# Altium PCB Example.PcbDoc (part 1 of 2)
Units mm, origin at the board's own origin, x right, y up, seen from the top; angles counter-clockwise.
Board outline 168.2 x 69.2 mm, 2 copper layers (Top Layer, Top, Bottom Layer, Bottom), stack 1.71 mm thick; 73 components, 24 nets, 188 pads, 846 vias.
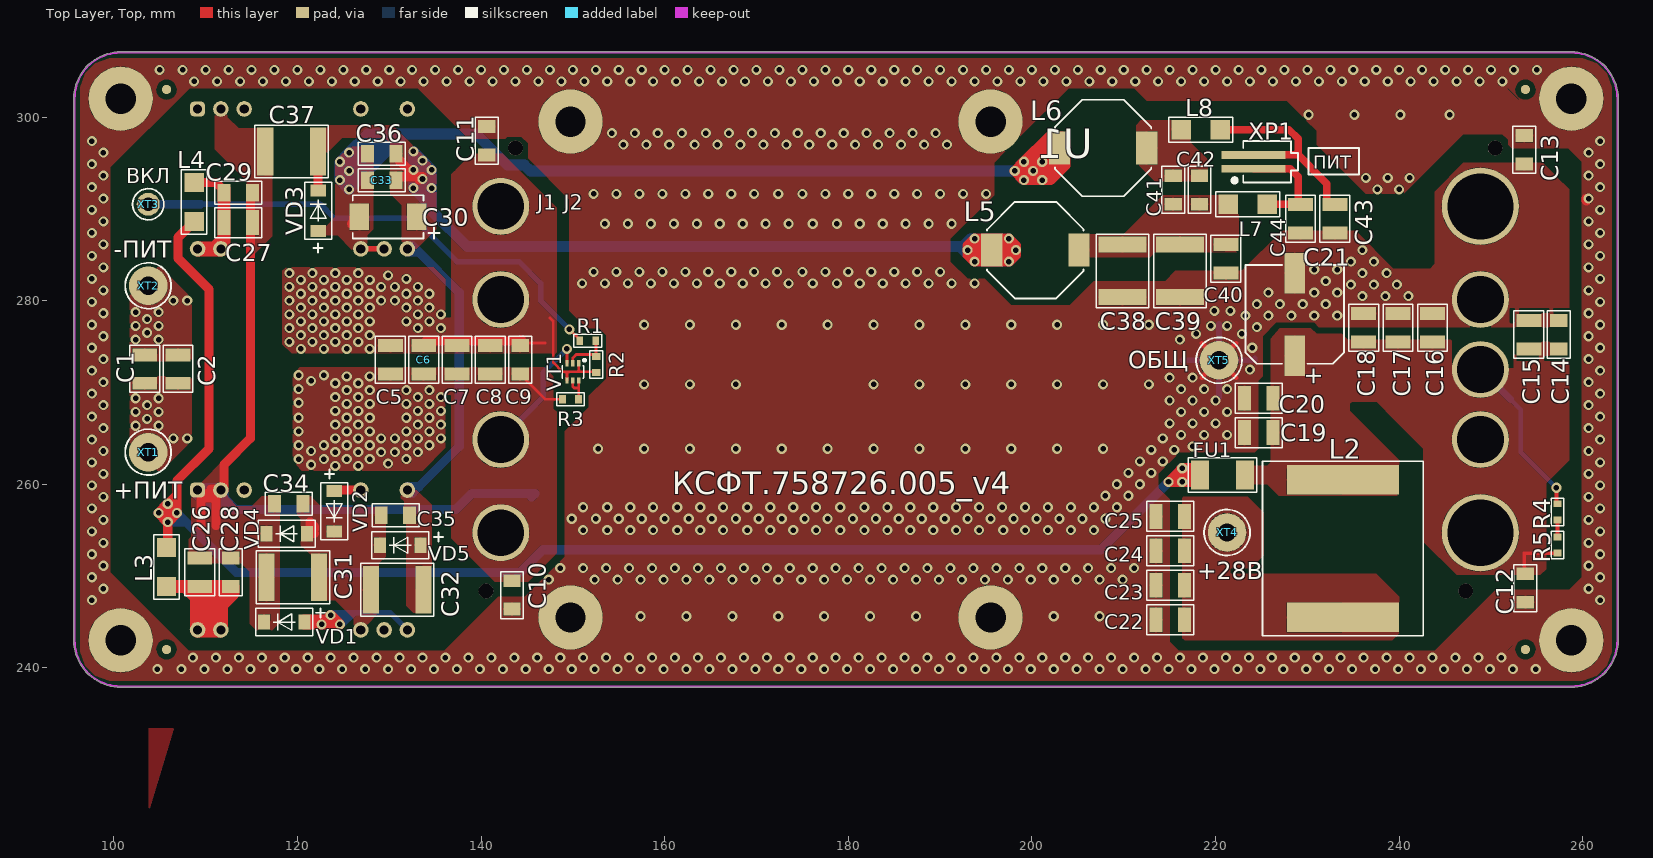
[diagram p0: Top Layer, Top view]
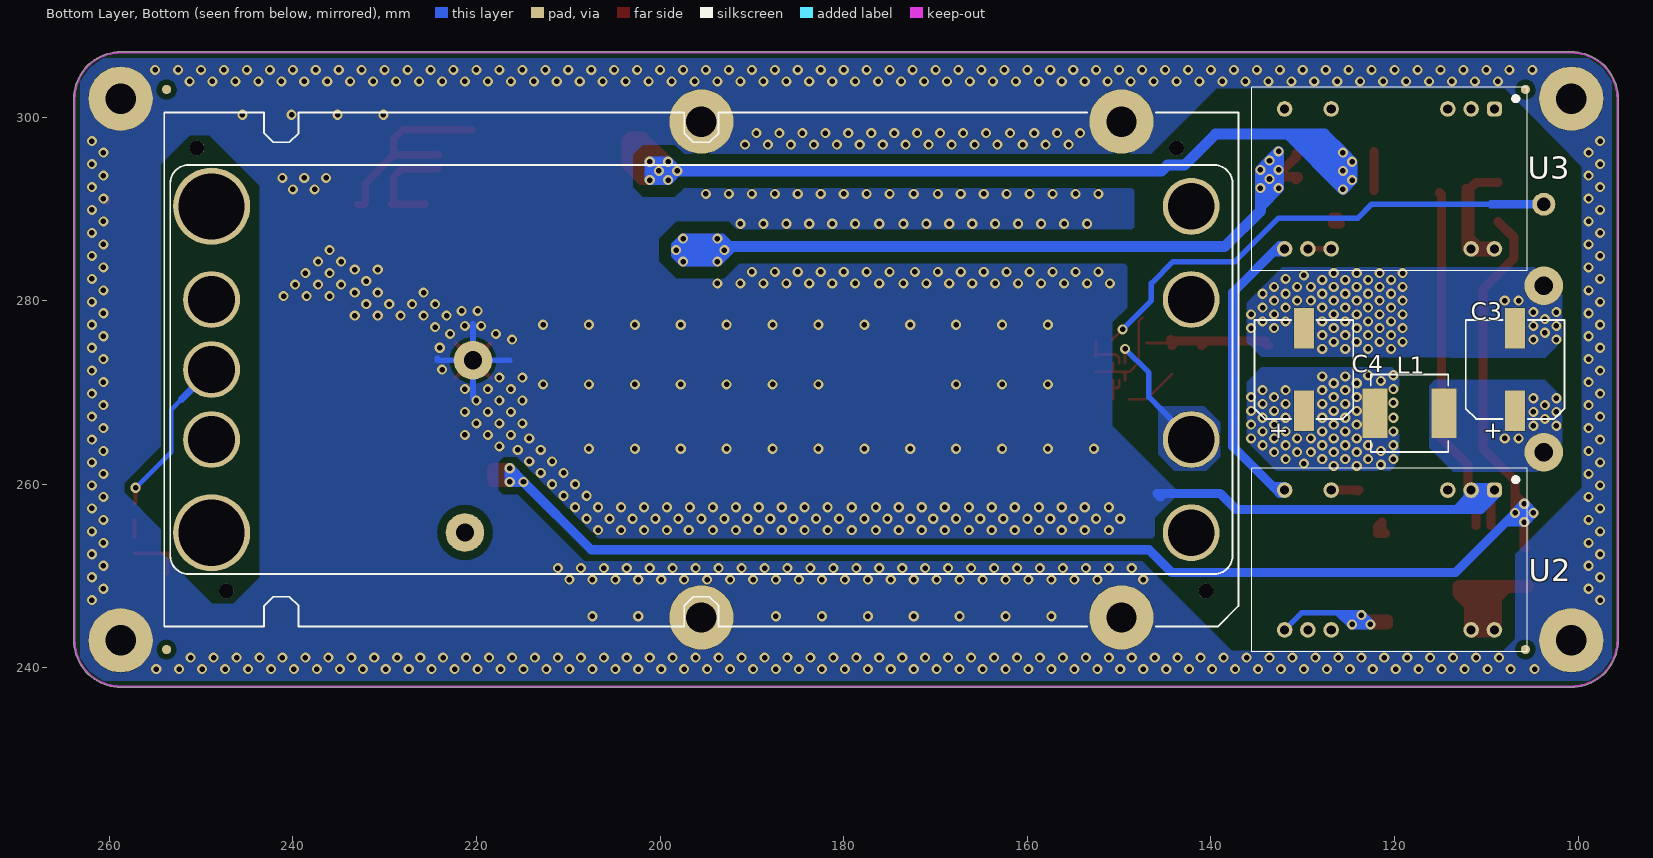
[diagram p1: Bottom Layer, Bottom view, seen from below]

## Layer stack, top to bottom
Top Solder, Top Mask: solder mask 0.01, Solder Resist, Dk 3.5
Top Layer, Top: signal copper 0.105
Dielectric 1: dielectric 1.5, FR-4, Dk 4.8
Bottom Layer, Bottom: signal copper 0.105
Bottom Solder, Bot Mask: solder mask 0.01, Solder Resist, Dk 3.5

## Board outline
100.75,237.9 cw(c100.75,243) 95.65,243 95.65,302 cw(c100.75,302) 100.75,307.1 258.75,307.1 cw(c258.75,302) 263.85,302 263.85,243 cw(c258.75,243) 258.75,237.9

## Design rules (kind name [scope] priority, off if disabled: settings)
AssemblyTestPointUsage [All] p1 off:
AssemblyTestpoint [All] p1 off: testpointundercomponent=TRUE minsize=1.016 maxsize=2.54 preferedsize=1.524 minholesize=0 maxholesize=1.016 preferedholesize=0.813 testpointgrid=0.025 usegrid=TRUE gridtolerance=0 allowsidetop=TRUE allowsidebottom=TRUE
Clearance "Clearance_Bottom Layer, Bottom" [ExistsOnLayer('Bottom Layer, Bottom') vs ExistsOnLayer('Bottom Layer, Bottom')] p1 off: gap=0.3 ignorepadtopadclearanceinfootprint=FALSE except(0.45: Arc-THPad Track-THPad; 0.5: Arc-Arc Arc-Track Track-Track THPad-THPad)
Clearance [All] p2 off: gap=0.254 ignorepadtopadclearanceinfootprint=FALSE except(0: Arc-Hole Track-Hole SMDPad-Hole THPad-Hole Via-Hole Fill-Hole Poly-Hole Region-Hole Text-Hole; 0.3: Arc-THPad Track-THPad THPad-THPad; 0.35: Arc-Arc Arc-Track Track-Track; 0.45: Arc-Via Track-Via; 0.5: THPad-Via Via-Via)
ComponentClearance [All] p1 off: gap=0.254 collisioncheckmode=3 verticalgap=0.254 showdistances=FALSE
DiffPairsRouting [All] p1 off: maxlimit=0.254 minlimit=0.254 mostfreqgap=0.254 toplayer_minwidth=0.381 toplayer_maxwidth=0.381 toplayer_prefwidth=0.381 bottomlayer_minwidth=0.381 bottomlayer_maxwidth=0.381 bottomlayer_prefwidth=0.381 maxuncoupledlength=12.7
FabricationTestPointUsage [All] p1 off: valid=0 allowmultiple=FALSE
FabricationTestpoint [All] p1 off: side=3 testpointundercomponent=TRUE minsize=1.016 maxsize=2.54 preferedsize=1.524 minholesize=0 maxholesize=1.016 preferedholesize=0.813 testpointgrid=0.025 allowsidetop=TRUE allowsidebottom=TRUE usegrid=TRUE gridtolerance=0
FanoutControl Fanout_BGA [IsBGA] p1 off: bgadir=Out bgaviamode=Centered fanoutstyle=Auto fanoutdirection=Alternating viagrid=0.025 // Fanout_BGA (Default Rule)
FanoutControl Fanout_LCC [IsLCC] p2 off: bgadir=Out bgaviamode=Centered fanoutstyle=Auto fanoutdirection=Alternating viagrid=0.025 // Fanout_LCC (Default Rule)
FanoutControl Fanout_SOIC [IsSOIC] p3 off: bgadir=Out bgaviamode=Centered fanoutstyle=Auto fanoutdirection=Alternating viagrid=0.025 // Fanout_SOIC (Default Rule)
FanoutControl Fanout_Small [(CompPinCount < 5)] p4 off: bgadir=Out bgaviamode=Centered fanoutstyle=Auto fanoutdirection=OutThenIn viagrid=0.025 // Fanout_Small (Default Rule)
FanoutControl Fanout_Default [All] p5 off: bgadir=Out bgaviamode=Centered fanoutstyle=Auto fanoutdirection=Alternating viagrid=0.025 // Fanout_Default (Default Rule)
Height [All] p1 off: minheight=0 maxheight=25.4 prefheight=12.7
HoleSize [All] p1 off: absolutevalues=TRUE maxlimit=2.54 minlimit=0.025 maxpercent=80.000 minpercent=20.000
HoleToHoleClearance [All] p1 off: gap=0.254 allowstackedmicrovias=TRUE
LayerPairs [All] p1 off: enforce=TRUE
MinimumSolderMaskSliver [All] p1 off: minsoldermaskwidth=0.254
NetAntennae [All] p1 off: netantennaetolerance=0
PasteMaskExpansion [All] p1 off: expansion=0
PlaneClearance [All] p1 off: clearance=0.2
PlaneConnect [All] p1 off: planeconnectstyle=Direct reliefexpansion=0.508 reliefentries=4 reliefconductorwidth=0.254 reliefairgap=0.254
PolygonConnect PolygonConnect_32 [IsPolygon And InNet('IN-27V') And OnLayer('Bottom Layer, Bottom') vs IsVia] p1 off: connectstyle=Direct reliefconductorwidth=0.381 reliefentries=4 polygonreliefangle="90 Angle" airgapwidth=0.254
PolygonConnect PolygonConnect_31 [IsPolygon And InNet('IN-27V') And OnLayer('Bottom Layer, Bottom') vs IsPad] p2 off: connectstyle=Direct reliefconductorwidth=0.381 reliefentries=4 polygonreliefangle="90 Angle" airgapwidth=0.254
PolygonConnect PolygonConnect_30 [IsPolygon And InNet('NET00013') And OnLayer('Bottom Layer, Bottom') vs IsVia] p3 off: connectstyle=Direct reliefconductorwidth=0.381 reliefentries=4 polygonreliefangle="90 Angle" airgapwidth=0.254
PolygonConnect PolygonConnect_29 [IsPolygon And InNet('NET00013') And OnLayer('Bottom Layer, Bottom') vs IsPad] p4 off: connectstyle=Direct reliefconductorwidth=0.381 reliefentries=4 polygonreliefangle="90 Angle" airgapwidth=0.254
PolygonConnect PolygonConnect_28 [IsPolygon And InNet('NET00029') And OnLayer('Bottom Layer, Bottom') vs IsVia] p5 off: connectstyle=Direct reliefconductorwidth=0.381 reliefentries=4 polygonreliefangle="90 Angle" airgapwidth=0.254
PolygonConnect PolygonConnect_27 [IsPolygon And InNet('NET00029') And OnLayer('Bottom Layer, Bottom') vs IsPad] p6 off: connectstyle=Direct reliefconductorwidth=0.381 reliefentries=4 polygonreliefangle="90 Angle" airgapwidth=0.254
PolygonConnect PolygonConnect_26 [IsPolygon And InNet('GND') And OnLayer('Bottom Layer, Bottom') vs IsVia] p7 off: connectstyle=Direct reliefconductorwidth=0.381 reliefentries=4 polygonreliefangle="90 Angle" airgapwidth=0.254
PolygonConnect PolygonConnect_25 [IsPolygon And InNet('GND') And OnLayer('Bottom Layer, Bottom') vs IsPad] p8 off: connectstyle=Direct reliefconductorwidth=0.381 reliefentries=4 polygonreliefangle="90 Angle" airgapwidth=0.254
PolygonConnect PolygonConnect_24 [IsPolygon And InNet('IN+27V') And OnLayer('Bottom Layer, Bottom') vs IsVia] p9 off: connectstyle=Direct reliefconductorwidth=0.381 reliefentries=4 polygonreliefangle="90 Angle" airgapwidth=0.254
PolygonConnect PolygonConnect_23 [IsPolygon And InNet('IN+27V') And OnLayer('Bottom Layer, Bottom') vs IsPad] p10 off: connectstyle=Direct reliefconductorwidth=0.381 reliefentries=4 polygonreliefangle="90 Angle" airgapwidth=0.254
PolygonConnect PolygonConnect_22 [IsPolygon And InNet('NET00007') And OnLayer('Top Layer, Top') vs IsVia] p11 off: connectstyle=Direct reliefconductorwidth=0.381 reliefentries=4 polygonreliefangle="90 Angle" airgapwidth=0.254
PolygonConnect PolygonConnect_21 [IsPolygon And InNet('NET00007') And OnLayer('Top Layer, Top') vs IsPad] p12 off: connectstyle=Direct reliefconductorwidth=0.381 reliefentries=4 polygonreliefangle="90 Angle" airgapwidth=0.254
PolygonConnect PolygonConnect_20 [IsPolygon And InNet('NET00031') And OnLayer('Top Layer, Top') vs IsVia] p13 off: connectstyle=Direct reliefconductorwidth=0.381 reliefentries=4 polygonreliefangle="90 Angle" airgapwidth=0.254
PolygonConnect PolygonConnect_19 [IsPolygon And InNet('NET00031') And OnLayer('Top Layer, Top') vs IsPad] p14 off: connectstyle=Direct reliefconductorwidth=0.381 reliefentries=4 polygonreliefangle="90 Angle" airgapwidth=0.254
PolygonConnect PolygonConnect_18 [IsPolygon And InNet('NET00032') And OnLayer('Top Layer, Top') vs IsVia] p15 off: connectstyle=Direct reliefconductorwidth=0.381 reliefentries=4 polygonreliefangle="90 Angle" airgapwidth=0.254
PolygonConnect PolygonConnect_17 [IsPolygon And InNet('NET00032') And OnLayer('Top Layer, Top') vs IsPad] p16 off: connectstyle=Direct reliefconductorwidth=0.381 reliefentries=4 polygonreliefangle="90 Angle" airgapwidth=0.254
PolygonConnect PolygonConnect_16 [IsPolygon And InNet('NET00010') And OnLayer('Top Layer, Top') vs IsVia] p17 off: connectstyle=Direct reliefconductorwidth=0.381 reliefentries=4 polygonreliefangle="90 Angle" airgapwidth=0.254
PolygonConnect PolygonConnect_15 [IsPolygon And InNet('NET00010') And OnLayer('Top Layer, Top') vs IsPad] p18 off: connectstyle=Direct reliefconductorwidth=0.381 reliefentries=4 polygonreliefangle="90 Angle" airgapwidth=0.254
PolygonConnect PolygonConnect_14 [IsPolygon And InNet('NET00013') And OnLayer('Top Layer, Top') vs IsVia] p19 off: connectstyle=Relief reliefconductorwidth=0.381 reliefentries=4 polygonreliefangle="45 Angle" airgapwidth=0.254
PolygonConnect PolygonConnect_13 [IsPolygon And InNet('NET00013') And OnLayer('Top Layer, Top') vs IsPad] p20 off: connectstyle=Relief reliefconductorwidth=0.375 reliefentries=4 polygonreliefangle="90 Angle" airgapwidth=0.254
PolygonConnect PolygonConnect_12 [IsPolygon And InNet('IN+27V') And OnLayer('Top Layer, Top') vs IsVia] p21 off: connectstyle=Direct reliefconductorwidth=0.381 reliefentries=4 polygonreliefangle="90 Angle" airgapwidth=0.254
PolygonConnect PolygonConnect_11 [IsPolygon And InNet('IN+27V') And OnLayer('Top Layer, Top') vs IsPad] p22 off: connectstyle=Direct reliefconductorwidth=0.381 reliefentries=4 polygonreliefangle="90 Angle" airgapwidth=0.254
PolygonConnect PolygonConnect_10 [IsPolygon And InNet('OUT+27V') And OnLayer('Top Layer, Top') vs IsVia] p23 off: connectstyle=Direct reliefconductorwidth=0.381 reliefentries=4 polygonreliefangle="90 Angle" airgapwidth=0.254
PolygonConnect PolygonConnect_9 [IsPolygon And InNet('OUT+27V') And OnLayer('Top Layer, Top') vs IsPad] p24 off: connectstyle=Relief reliefconductorwidth=0.6 reliefentries=4 polygonreliefangle="90 Angle" airgapwidth=0.254
PolygonConnect PolygonConnect_8 [IsPolygon And InNet('NET00006') And OnLayer('Top Layer, Top') vs IsVia] p25 off: connectstyle=Direct reliefconductorwidth=0.381 reliefentries=4 polygonreliefangle="90 Angle" airgapwidth=0.254
PolygonConnect PolygonConnect_7 [IsPolygon And InNet('NET00006') And OnLayer('Top Layer, Top') vs IsPad] p26 off: connectstyle=Direct reliefconductorwidth=0.381 reliefentries=4 polygonreliefangle="90 Angle" airgapwidth=0.254
PolygonConnect PolygonConnect_6 [IsPolygon And InNet('NET00009') And OnLayer('Top Layer, Top') vs IsVia] p27 off: connectstyle=Relief reliefconductorwidth=0.381 reliefentries=4 polygonreliefangle="45 Angle" airgapwidth=0.254
PolygonConnect PolygonConnect_5 [IsPolygon And InNet('NET00009') And OnLayer('Top Layer, Top') vs IsPad] p28 off: connectstyle=Direct reliefconductorwidth=0.5 reliefentries=4 polygonreliefangle="90 Angle" airgapwidth=0.254
PolygonConnect PolygonConnect_4 [IsPolygon And InNet('GND') And OnLayer('Top Layer, Top') vs IsVia] p29 off: connectstyle=Relief reliefconductorwidth=0.381 reliefentries=4 polygonreliefangle="45 Angle" airgapwidth=0.254
PolygonConnect PolygonConnect_3 [IsPolygon And InNet('GND') And OnLayer('Top Layer, Top') vs IsPad] p30 off: connectstyle=Relief reliefconductorwidth=0.375 reliefentries=4 polygonreliefangle="90 Angle" airgapwidth=0.254
PolygonConnect PolygonConnect_2 [IsPolygon And InNet('IN-27V') And OnLayer('Top Layer, Top') vs IsVia] p31 off: connectstyle=Relief reliefconductorwidth=0.381 reliefentries=4 polygonreliefangle="45 Angle" airgapwidth=0.254
PolygonConnect PolygonConnect_1 [IsPolygon And InNet('IN-27V') And OnLayer('Top Layer, Top') vs IsPad] p32 off: connectstyle=Relief reliefconductorwidth=0.375 reliefentries=4 polygonreliefangle="90 Angle" airgapwidth=0.254
PolygonConnect [All] p33 off: connectstyle=Relief reliefconductorwidth=0.254 reliefentries=4 polygonreliefangle="90 Angle" airgapwidth=0.254
RoutingCorners [All] p1 off: cornerstyle=45-Degree minsetback=2.54 maxsetback=2.54
RoutingLayers [All] p1 off: top layer_v5=TRUE bottom layer_v5=TRUE
RoutingPriority [All] p1 off: routingpriority=0
RoutingTopology [All] p1 off: topology=Shortest
RoutingVias [All] p1 off: holewidth=0.711 width=1.27 viastyle="Through Hole" minholewidth=0.711 minwidth=1.27 maxholewidth=0.711 maxwidth=1.27
ShortCircuit [All] p1 off: allowed=FALSE
SilkToBoardRegionClearance [All] p1 off:
SilkToSilkClearance [All] p1 off: silktosilkclearance=0.254
SilkToSolderMaskClearance [IsPad] p1 off: minsilkscreentomaskgap=0.254 clearancetoexposedcopper=TRUE
SolderMaskExpansion [All] p1 off: expansion=0.102
UnRoutedNet [All] p1 off:
UnpouredPolygon [All] p1 off:
Width [All] p1 off: maxlimit=0.254 minlimit=0.254 preferedwidth=0.254

## Components (designator, comment, footprint, x,y, rotation, side; value= is the part's Value field where it differs from the comment)
C1 "10,0/50" CC1210 103.375,271 r90 top
C2 "10,0/50" CC1210 107,271 r90 top
C3 "330,0/50" CVAX_7_CVAX_7(Primary) 106.875,277 r270 bottom
C4 "330,0/50" CVAX_7_CVAX_7(Primary) 129.875,277 r270 bottom
C5 "10,0/50" CC1210 130.125,272 r90 top
C6 "10,0/50" CC1210 133.75,272 r90 top
C7 "10,0/50" CC1210 137.375,272 r90 top
C8 "10,0/50" CC1210 141,272 r90 top
C9 "1,0/50" SC1206 144.25,272 r90 top
C10 "0,01/250" SC1206 143.375,249.5 r270 top
C11 "0,01/250" SC1206 140.625,295.875 r90 top
C12 "0,01/250" SC1206 253.75,250.25 r270 top
C13 "0,01/250" SC1206 253.625,294.875 r90 top
C14 "1,0/50" SC1206 257.375,274.75 r90 top
C15 "10,0/50" CC1210 254.125,274.75 r90 top
C16 "10,0/50" CC1210 243.625,275.5 r90 top
C17 "10,0/50" CC1210 239.875,275.5 r90 top
C18 "10,0/50" CC1210 236.125,275.5 r90 top
C19 "10,0/50" CC1210 226.25,265.625 r180 top
C20 "10,0/50" CC1210 226.25,269.375 r180 top
C21 "330,0/50" CVAX_7_CVAX_7(Primary) 228.625,283 r270 top
C22 "10,0/50" CC1210 216.625,245.25 r180 top
C23 "10,0/50" CC1210 216.625,249 r180 top
C24 "10,0/50" CC1210 216.625,252.75 r180 top
C25 "10,0/50" CC1210 216.625,256.5 r180 top
C26 "10,0/50" CC1210 109.375,248.875 r90 top
C27 "10,0/50" CC1210 112,288.5 r0 top
C28 "0,1/100" SC1206 112.75,248.875 r90 top
C29 "0,1/100" SC1206 112,291.75 r0 top
C30 "100,0/16" C-P_7343M 133,289.125 r180 top
C31 "4,7/100" CC2020 116.625,249.875 r0 top
C32 "4,7/100" CC2020 128,248.5 r0 top
C33 "22,0/16" SC1206 130.75,293.125 r180 top
C34 "0,1/100" SC1206 117.5,257.875 r0 top
C35 "0,1/100" SC1206 129.125,256.625 r0 top
C36 "1,0/50" SC1206 130.75,296 r180 top
C37 "2,2/250" CC2020 116.5,296.25 r0 top
C38 "2,2/250" CC2020 209.875,280.375 r90 top
C39 "2,2/250" CC2020 216.125,280.375 r90 top
C40 "0,1/250" CC1210 221.125,283 r90 top
C41 "22,0/16" SC1206 215.375,290.5 r90 top
C42 "1,0/50" SC1206 218.25,290.5 r90 top
C43 "0,1/250" CC1210 233,287.375 r90 top
C44 "0,1/250" CC1210 229.25,287.375 r90 top
FU1 "0451001.MRL" NANO_2 220.75,261 r0 top
L1 "IHLP3232DZER1R0M1A" IHLP3232 118.375,267.75 r0 bottom
L2 "IHLP6767GZER8R2M11" IHLP6767GZ 233.875,253 r90 top
L3 "BLM41PG102SH1" L_BLM41P 105.75,253.125 r270 top
L4 "BLM41PG102SH1" L_BLM41P 108.75,288.625 r90 top
L5 "SRU1028-470Y" L_SRU1028 195.625,285.5 r0 top
L6 "SRU1028-470Y" L_SRU1028 203,296.625 r0 top
L7 "BLM41PG102SH1" L_BLM41P 221.375,290.5 r0 top
L8 "BLM41PG102SH1" L_BLM41P 216.25,298.625 r0 top
R1 "27K" R_0603 152.5,275.625 r180 top
R2 "4K7" R_0603 152.55,272.175 r90 top
R3 "10K" R_0603 148.875,269.25 r0 top
R4 "300K" R_0603 257.25,256.125 r90 top
R5 "27K" R_0603 257.25,254.25 r270 top
U1 "" VICOR_MAXI 195.5,272.5 r0 top locked
U2 "МДМ5-2В6868ТП" MDM5-1P_MDM5-2P_V2(Primary) 109.125,259.375 r270 bottom
U3 "МДМ5-1В05ТП" MDM5-1P_MDM5-1P_V2(Primary) 109.125,300.875 r270 bottom
VD1 "GF1J" GF1_GF1A(Primary) 116.375,245 r0 top
VD2 "GF1J" GF1_GF1A(Primary) 124,254.875 r90 top
VD3 "GF1J" GF1_GF1A(Primary) 122.25,292 r270 top
VD4 "GF1J" GF1_GF1A(Primary) 116.625,254.625 r0 top
VD5 "GF1J" GF1_GF1A(Primary) 129,253.375 r0 top
VT1 "BC846BS" SOT363 150,272.25 r180 top
XP1 "87438-0243  MOLEX" MOLEX_87438-0243 224.125,294.375 r270 top
XT1 "" PS1_8#1 103.75,263.5 r0 top
XT2 "" PS1_8#1 103.75,281.625 r0 top
XT3 "" PS1_8#2 103.75,290.5 r180 top
XT4 "" PS1_8#1 221.25,254.75 r0 top
XT5 "" PS1_8#1 220.375,273.5 r0 top

## Footprints (in the part's own frame and the unit in brackets; to place one, negate y for a bottom-side part, rotate by r counter-clockwise, add the part's x,y. Pads: shape width x height; smd on the part's side, far side on the other; paste and mask are expansions set on the pad)
C-P_7343M [mm]
  rect 2.15x2.9 smd: 1(0,0) 2(6.25,0)
  silkscreen extent -2.5,-2.35 6.98,2.37
CC1210 [mm]
  rect 1.4x2.7 smd: 1(0,0) 2(3.1,0)
  silkscreen extent -1,-1.63 4.13,1.63
CC2020 [mm]
  rect 1.75x5.2 smd: 1(0,0) 2(5.75,0)
  silkscreen extent -1.12,-2.88 6.88,2.88
CVAX_7_CVAX_7(Primary) [mm]
  rect 4.4x2.2 smd: A(9,0) C(0,0)
  silkscreen extent -0.87,-5.38 9.87,5.38
GF1_GF1A(Primary) [mm]
  rect 1.32x1.68 smd: A(4.4,0) C(0,0)
  silkscreen extent -0.9,-1.48 5.3,1.48
IHLP3232 [mm]
  rect 2.7x5.4 smd: 1(-3.75,0) 2(3.75,0)
  silkscreen extent -4.23,-4.23 4.23,4.23
IHLP6767GZ [mm]
  rect 3.2x12.2 smd: 1(-7.5,0) 2(7.5,0)
  silkscreen extent -9.5,-8.75 9.5,8.75
L_BLM41P [mm]
  rect 2.1x2.1 smd: 1(0,0) 2(4.25,0)
  silkscreen extent -1.38,-1.38 5.63,1.38
L_SRU1028 [mm]
  rect 2.3x3.6 smd: 1(0,0) 2(9.5,0)
  silkscreen extent -0.5,-5.25 10,5.25
MDM5-1P_MDM5-1P_V2(Primary) [mm]
  rrect50% 1.6x1.6 hole 1: 2(0,0)
  round 1.7 hole 1: 3(0,-2.54) 4(0,-5.08) 9(0,-17.78) 11(0,-22.86) 14(15.24,-22.86) 15(15.24,-20.32) 16(15.24,-17.78) 22(15.24,-2.54) 23(15.24,0)
  silkscreen extent -2.38,-26.43 17.62,3.57
MDM5-1P_MDM5-2P_V2(Primary) [mm]
  rrect50% 1.6x1.6 hole 1: 2(0,0)
  round 1.7 hole 1: 3(0,-2.54) 4(0,-5.08) 9(0,-17.78) 11(0,-22.86) 14(15.24,-22.86) 15(15.24,-20.32) 16(15.24,-17.78) 22(15.24,-2.54) 23(15.24,0)
  silkscreen extent -2.38,-26.43 17.62,3.57
MOLEX_87438-0243 [mm]
  rect 0.85x7 smd: 1(0,0) 2(-1.5,0)
  silkscreen extent -3,-2.25 1.5,4.85
NANO_2 [mm]
  rect 1.96x3.15 smd: 1(-2.455,0) 2(2.455,0)
  silkscreen extent -3.75,-1.88 3.75,1.88
PS1_8#1 [mm]
  round 4.2 hole 2: 1(0,0)
PS1_8#2 [mm]
  round 2.5 hole 1.5: 1(0,0)
R_0603 [mm]
  rect 0.75x0.9 smd: 1(0,0) 2(1.75,0)
  silkscreen extent -0.65,-0.7 2.37,0.7
SC1206 [mm]
  rect 1.4x1.9 smd: 1(0,0) 2(3.1,0)
  silkscreen extent -1,-1.25 4.13,1.25
SOT363 [mm]
  rect 0.35x0.7 smd: 1(-0.65,-0.95) 2(0,-0.95) 3(0.65,-0.95) 4(0.65,0.95) 5(0,0.95) 6(-0.65,0.95)
  silkscreen extent -1.4,-1.37 1.17,0.67
VICOR_MAXI [mm]
  round 6.2 hole 5.1: 1(-53.35,-17.775) 2(-53.35,-7.625) 3(-53.35,7.625) 4(-53.35,17.775) 6(53.35,7.625) 7(53.35,0) 8(53.35,-7.625)
  round 8.4 hole 7.2: 5(53.35,17.775) 9(53.35,-17.775)
  round 7 hole 3.3: 10(-45.75,-27) 11(-45.75,27)
  round 1.6 hole 1.6 unplated: 12(-54.95,-24.125) 13(-51.75,24.125) 14(54.95,24.125) 15(51.75,-24.125)

## Free pads (board coordinates)
  round 7 hole 3.3: 0(100.75,243) 0(100.75,302) 0(258.75,243) 0(258.75,302) 10(195.5,245.5) 11(195.5,299.5)
  round 1 smd mask-25.4: 0(105.75,242) 0(105.75,303) 0(253.75,242) 0(253.75,303)
  round 1 smd far side: 0(105.75,242) 0(105.75,303) 0(253.75,242) 0(253.75,303)

## Via types
v1: diameter 1.1, hole 0.6, Top Layer, Top to Bottom Layer, Bottom, 846 vias

## Nets (pads, with @x,y where several pads share a name; then routed paths per layer and width w, separated by ;. In a path a pad name is that pad's centre, name@x,y a point inside that pad or via, vN(x,y) a via of type N, cw(c..) or ccw(c..) an arc to the next point about the centre after c; other vN are vias at no path point)
-136V: C44.2 L7.2 XP1.1 | length 12.3
  Top Layer, Top w0.8: XP1.1@224.125,294.375 228.125,294.375 229,293.5 229,290.625 C44.2@228.875,290.5 ; L7.2@225.625,290.625 L7.2@225.687,290.562 ; L7.2@225.75,290.375 L7.2@225.75,290.5 ; C44.2@229.25,290.475 229.225,290.5 C44.2@228.875,290.5 ; L7.2@225.687,290.562 L7.2@225.625,290.5 L7.2@225.75,290.5 ; L7.2@225.687,290.562 L7.2@225.75,290.5 ; L7.2@225.75,290.5 C44.2@228.875,290.5
-141V: C43.2 L8.2 XP1.2 | length 23.7
  Top Layer, Top w0.8: L8.2@220.5,298.625 228,298.625 229,297.625 229,296.25 ; XP1.2@224.125,295.875 228.625,295.875 ; C43.2@232.1,290.475 C43.2@232.15,290.475 ; C43.2@233,290.475 C43.2@232.15,290.475 ; 228.625,295.875 229,295.875 ; 228.625,295.875 229,296.25 ; 229,295.875 229,296.25 ; 229,295.875 232.125,292.75 232.125,290.5 C43.2@232.15,290.475
GND: C10.2 C11.2 C12.2 C13.1 C13.2 C14.2 C15.2 C16.2 C17.2 C18.2 C19.2 C20.2 C21.C C22.2 C23.2 C24.2 C25.2 C26.2 C27.2 C28.2 C29.2 C31.1 C34.1 C37.1 C38.1 C39.1 C40.1 C43.1 C44.1 pad.0@100.75,243 pad.0@100.75,302 pad.0@258.75,243 pad.0@258.75,302 pad.10 pad.11 U1.5 U1.6 U1.10 U1.11 U2.2 U2.3 U3.3 VD1.C VD4.C XT5.1 | length 132.7
  Top Layer, Top w0.5: 218.5,271.625 XT5.1@220.375,273.5 ; 218.5,275.375 XT5.1@220.375,273.5 ; XT5.1@220.375,273.75 XT5.1@220.375,273.5 ; 222.25,271.625 XT5.1@220.375,273.5 ; 222.25,275.375 XT5.1@220.375,273.5
  Top Layer, Top w0.8: v1@217.75,276.375 v1(217.875,276.375)
  Top Layer, Top w1: U2.2@109.125,259.375 109.5,259 109.5,255.5 ; 109.625,258.5 111.125,258.5 ; 110.125,259 U2.3@111.25,259 ; 110.625,259.5 111.875,259.5 U2.3@112,259.375 ; 111.125,255.5 111.125,258.5 ; U2.3@111.625,259.375 U2.3@111.665,259.375 ; v1@260.375,290.875 v1(260.625,291.125) v1@260.375,291.125 ; 111.125,258.5 111.125,258.875 U2.3@111.25,259 ; U2.3@111.25,259 111.625,259 U2.3@111.665,259.04 ; U2.3@111.665,259.04 U2.3@112,259.375 ; U2.3@111.665,259.04 U2.3@111.665,259.375 ; U2.3@111.665,259.375 U2.3@112,259.375 ; U2.3@112,259.375 112,262.125 114.875,265 114.875,291.5 C29.2@115.1,291.725 ; C29.2@115.1,291.725 115.113,291.738 115.125,291.75 C29.2@115.1,291.75 C29.2@115.1,291.725
  Bottom Layer, Bottom w0.6: 216.375,273.5 XT5.1@220.375,273.5 ; v1@220.375,269.5 XT5.1@220.375,273.5 ; 220.375,277.5 XT5.1@220.375,273.5 ; 224.25,273.75 224.25,273.5 XT5.1@220.375,273.5
  Bottom Layer, Bottom w0.8: v1@217.75,276.375 v1(217.875,276.375) ; v1(222.875,276.375) v1@223,276.375
  Bottom Layer, Bottom w1: 111.335,258.29 112.375,257.25 ; 111.335,258.421 111.024,258.73 110.375,259.375 ; 111.375,258.375 112.375,257.375 112.375,257.25 ; U2.3@111.665,259.375 U2.3@111.665,259.165 ; 145.5,258.625 145.875,259 139,259 137.25,257.25 113.25,257.25 ; 110.375,259.375 U2.3@111.375,259.375 ; 110.375,259.375 109.375,259.375 109.25,259.5 109.125,259.625 U2.3@111.625,259.625 ; 111.25,257.25 110.625,257.25 108.875,259 108.875,259.125 U2.2@109.125,259.375 111.25,257.25 ; 111.25,257.25 112.375,257.25 ; U2.3@111.375,259.375 U2.3@111.625,259.625 ; U2.3@111.375,259.375 U2.3@111.625,259.375 ; U2.3@111.625,259.125 111.625,258.875 U2.3@111.665,258.835 ; U2.3@111.625,259.125 U2.3@111.665,259.145 ; U2.3@111.625,259.125 U2.3@111.625,259.165 ; U2.3@111.625,259.165 U2.3@111.625,259.375 ; U2.3@111.625,259.165 U2.3@111.665,259.165 ; U2.3@111.625,259.375 U2.3@111.625,259.625 ; U2.3@111.625,259.625 111.75,259.625 112,259.375 112,258.5 ; U2.3@111.665,258.835 U2.3@111.665,259.145 ; U2.3@111.665,258.835 112,258.5 ; U2.3@111.665,259.145 U2.3@111.705,259.165 ; U2.3@111.665,259.145 U2.3@111.665,259.165 ; U2.3@111.665,259.165 U2.3@111.705,259.165 ; U2.3@111.705,259.165 111.757,259.191 111.875,259.25 111.832,259.207 111.79,259.165 U2.3@111.705,259.165 ; 112,258.5 113.25,257.25 ; 112.375,257.25 113.25,257.25
  other v1: 104.75,239.875 107.375,239.875 109.875,239.875 112.375,239.875 114.875,239.875 117.375,239.875 119.875,239.875 122.375,239.875 124.875,239.875 127.375,239.875 129.875,239.875 132.375,239.875 134.875,239.875 137.375,239.875 139.875,239.875 142.375,239.875 144.875,239.875 147.375,239.875 149.875,239.875 152.375,239.875 154.875,239.875 157.375,239.875 159.875,239.875 162.375,239.875 164.875,239.875 167.375,239.875 169.875,239.875 172.375,239.875 174.875,239.875 177.375,239.875 179.875,239.875 182.375,239.875 184.875,239.875 187.375,239.875 189.875,239.875 192.375,239.875 194.875,239.875 197.375,239.875 199.875,239.875 202.375,239.875 204.875,239.875 207.375,239.875 209.875,239.875 212.375,239.875 214.875,239.875 217.375,239.875 219.875,239.875 222.375,239.875 224.875,239.875 227.375,239.875 229.875,239.875 232.375,239.875 234.875,239.875 237.375,239.875 239.875,239.875 242.375,239.875 244.875,239.875 247.375,239.875 249.875,239.875 252.375,239.875 254.875,239.875 108.625,241.125 111.125,241.125 113.625,241.125 116.125,241.125 118.625,241.125 121.125,241.125 123.625,241.125 126.125,241.125 128.625,241.125 131.125,241.125 133.625,241.125 136.125,241.125 138.625,241.125 141.125,241.125 143.625,241.125 146.125,241.125 148.625,241.125 151.125,241.125 153.625,241.125 156.125,241.125 158.625,241.125 161.125,241.125 163.625,241.125 166.125,241.125 168.625,241.125 171.125,241.125 173.625,241.125 176.125,241.125 178.625,241.125 181.125,241.125 183.625,241.125 186.125,241.125 188.625,241.125 191.125,241.125 193.625,241.125 196.125,241.125 198.625,241.125 201.125,241.125 203.625,241.125 206.125,241.125 208.625,241.125 211.125,241.125 213.625,241.125 216.125,241.125 218.625,241.125 221.125,241.125 223.625,241.125 226.125,241.125 228.625,241.125 231.125,241.125 233.625,241.125 236.125,241.125 238.625,241.125 241.125,241.125 243.625,241.125 246.125,241.125 248.625,241.125 251.125,241.125 157.375,245.625 162.375,245.625 167.375,245.625 172.375,245.625 177.375,245.625 182.375,245.625 187.375,245.625 202.375,245.625 207.375,245.625 97.625,247.375 261.875,247.375 98.875,248.625 260.625,248.625 147.375,249.625 152.375,249.625 154.875,249.625 157.375,249.625 159.875,249.625 162.375,249.625 164.875,249.625 167.375,249.625 169.875,249.625 172.375,249.625 174.875,249.625 177.375,249.625 179.875,249.625 182.375,249.625 184.875,249.625 187.375,249.625 189.875,249.625 192.375,249.625 194.875,249.625 197.375,249.625 199.875,249.625 202.375,249.625 204.875,249.625 207.375,249.625 209.875,249.625 97.625,249.875 261.875,249.875 148.625,250.875 151.125,250.875 153.625,250.875 156.125,250.875 158.625,250.875 161.125,250.875 163.625,250.875 166.125,250.875 168.625,250.875 171.125,250.875 173.625,250.875 176.125,250.875 178.625,250.875 181.125,250.875 183.625,250.875 186.125,250.875 188.625,250.875 191.125,250.875 193.625,250.875 196.125,250.875 198.625,250.875 201.125,250.875 203.625,250.875 206.125,250.875 208.625,250.875 211.125,250.875 98.875,251.125 260.625,251.125 97.625,252.375 261.875,252.375 98.875,253.625 260.625,253.625 97.625,254.875 261.875,254.875 151.125,255 153.75,255 156.25,255 158.75,255 161.375,255 163.875,255 166.375,255 169,255 171.5,255 174,255 176.5,255 179.125,255 181.75,255 184.25,255 186.75,255 189.25,255 191.75,255 194.25,255 196.875,255 199.25,255 201.75,255 204.25,255 206.75,255 98.875,256.125 260.625,256.125 149.875,256.25 152.5,256.25 155,256.25 157.5,256.25 160,256.25 162.625,256.25 165.125,256.25 167.75,256.25 170.25,256.25 172.75,256.25 175.25,256.25 177.75,256.25 180.5,256.25 183,256.25 185.5,256.25 188,256.25 190.5,256.25 193,256.25 195.5,256.25 198,256.25 200.5,256.25 203,256.25 205.5,256.25 208,256.25 97.625,257.375 261.875,257.375 151.125,257.5 153.75,257.5 156.25,257.5 158.75,257.5 161.375,257.5 163.875,257.5 166.375,257.5 169,257.5 171.5,257.5 174,257.5 176.5,257.5 179.125,257.5 181.75,257.5 184.25,257.5 186.75,257.5 189.25,257.5 191.75,257.5 194.25,257.5 196.75,257.5 199.25,257.5 201.75,257.5 204.25,257.5 206.75,257.5 209.25,257.5 98.875,258.625 260.625,258.625 208,258.75 210.5,258.75 97.625,259.875 261.875,259.875 209.25,260 211.75,260 98.875,261.125 260.625,261.125 210.5,261.25 213,261.25 97.625,262.375 261.875,262.375 211.75,262.5 214.25,262.5 98.875,263.625 260.625,263.625 213,263.75 215.5,263.75 152.75,263.875 157.75,263.875 162.75,263.875 167.75,263.875 172.75,263.875 177.75,263.875 182.75,263.875 187.75,263.875 192.75,263.875 197.75,263.875 202.75,263.875 207.75,263.875 217.5,264.125 97.625,264.875 261.875,264.875 214.25,265 216.25,265.375 218.75,265.375 221.25,265.375 98.875,266.125 260.625,266.125 215,266.625 217.5,266.625 220,266.625 97.625,267.375 261.875,267.375 216.25,267.875 218.75,267.875 221.25,267.875 98.875,268.625 260.625,268.625 215,269.125 217.5,269.125 220,269.125 97.625,269.875 261.875,269.875 216.25,270.375 218.75,270.375 221.25,270.375 157.75,270.875 162.75,270.875 167.75,270.875 182.75,270.875 187.75,270.875 192.75,270.875 197.75,270.875 202.75,270.875 207.75,270.875 212.75,270.875 98.875,271.125 260.625,271.125 215,271.625 217.5,271.625 97.625,272.375 261.875,272.375 223.75,272.5 98.875,273.625 260.625,273.625 97.625,274.875 224,274.875 261.875,274.875 216.125,275.75 98.875,276.125 260.625,276.125 224.5,277.125 219.5,277.25 221.25,277.25 97.625,277.375 157.75,277.375 162.75,277.375 167.75,277.375 172.75,277.375 177.75,277.375 182.75,277.375 187.75,277.375 192.75,277.375 197.75,277.375 202.75,277.375 207.75,277.375 212.75,277.375 261.875,277.375 223.25,278.375 225.75,278.375 228.25,278.375 230.75,278.375 233.25,278.375 98.875,278.625 260.625,278.625 219.875,278.875 221.625,278.875 224.5,279.625 227,279.625 229.5,279.625 232,279.625 97.625,279.875 261.875,279.875 236,280.5 238.5,280.5 241,280.5 225.75,280.875 230.75,280.875 233.25,280.875 98.875,281.125 260.625,281.125 234.75,281.75 237.25,281.75 239.75,281.75 151,281.875 153.5,281.875 156,281.875 158.5,281.875 161,281.875 163.5,281.875 166,281.875 168.5,281.875 171,281.875 173.5,281.875 176.125,281.875 178.75,281.875 181.25,281.875 183.75,281.875 186.25,281.875 188.75,281.875 191.25,281.875 193.75,281.875 232,282.125 97.625,282.375 261.875,282.375 236,283 238.625,283 152.25,283.125 154.75,283.125 157.25,283.125 159.75,283.125 162.25,283.125 164.75,283.125 167.25,283.125 169.75,283.125 172.25,283.125 175,283.125 177.5,283.125 180,283.125 182.5,283.125 185,283.125 187.5,283.125 190,283.125 230.75,283.375 233.25,283.375 98.875,283.625 260.625,283.625 234.75,284.25 237.25,284.25 97.625,284.875 261.875,284.875 236,285.5 98.875,286.125 260.625,286.125 97.625,287.375 261.875,287.375 153.5,288.375 156,288.375 158.5,288.375 161,288.375 163.5,288.375 166,288.375 168.5,288.375 171,288.375 173.5,288.375 176.125,288.375 178.75,288.375 181.25,288.375 183.75,288.375 186.25,288.375 188.75,288.375 191.25,288.375 98.875,288.625 260.625,288.625 97.625,289.875 261.875,289.875 98.875,291.125 152.25,291.625 154.75,291.625 157.25,291.625 159.75,291.625 162.25,291.625 164.75,291.625 167.25,291.625 169.75,291.625 172.375,291.625 175,291.625 177.5,291.625 180,291.625 182.5,291.625 185,291.625 187.5,291.625 190,291.625 192.5,291.625 195,291.625 237.625,292.125 240,292.125 97.625,292.375 261.875,292.375 236.375,293.375 238.75,293.375 241.125,293.375 98.875,293.625 260.625,293.625 97.625,294.875 261.875,294.875 98.875,296.125 260.625,296.125 155.5,297 158,297 160.5,297 163.25,297 165.75,297 168.25,297 170.75,297 173.25,297 175.75,297 178.25,297 180.75,297 183.25,297 185.75,297 188.25,297 190.75,297 97.625,297.375 261.875,297.375 154.25,298.25 156.75,298.25 159.25,298.25 161.875,298.25 164.5,298.25 167,298.25 169.5,298.25 172,298.25 174.5,298.25 177,298.25 179.5,298.25 182,298.25 184.5,298.25 187,298.25 189.5,298.25 230.125,300.25 235.125,300.25 240.125,300.25 245.5,300.25 108.75,303.875 111.25,303.875 113.75,303.875 116.25,303.875 118.75,303.875 121.25,303.875 123.75,303.875 126.25,303.875 128.75,303.875 131.25,303.875 133.75,303.875 136.25,303.875 138.75,303.875 141.25,303.875 143.75,303.875 146.25,303.875 148.75,303.875 151.25,303.875 153.75,303.875 156.25,303.875 158.75,303.875 161.25,303.875 163.75,303.875 166.25,303.875 168.75,303.875 171.25,303.875 173.75,303.875 176.25,303.875 178.75,303.875 181.25,303.875 183.75,303.875 186.25,303.875 188.75,303.875 191.25,303.875 193.75,303.875 196.25,303.875 198.75,303.875 201.25,303.875 203.75,303.875 206.25,303.875 208.75,303.875 211.25,303.875 213.75,303.875 216.25,303.875 218.75,303.875 221.25,303.875 223.75,303.875 226.25,303.875 228.75,303.875 231.25,303.875 233.75,303.875 236.25,303.875 238.75,303.875 241.25,303.875 243.75,303.875 246.25,303.875 248.75,303.875 251.25,303.875 105,305.125 107.5,305.125 110,305.125 112.5,305.125 115,305.125 117.5,305.125 120,305.125 122.5,305.125 125,305.125 127.5,305.125 130,305.125 132.5,305.125 135,305.125 137.5,305.125 140,305.125 142.5,305.125 145,305.125 147.5,305.125 150,305.125 152.5,305.125 155,305.125 157.5,305.125 160,305.125 162.5,305.125 165,305.125 167.5,305.125 170,305.125 172.5,305.125 175,305.125 177.5,305.125 180,305.125 182.5,305.125 185,305.125 187.5,305.125 190,305.125 192.5,305.125 195,305.125 197.5,305.125 200,305.125 202.5,305.125 205,305.125 207.5,305.125 210,305.125 212.5,305.125 215,305.125 217.5,305.125 220,305.125 222.5,305.125 225,305.125 227.5,305.125 230,305.125 232.5,305.125 235,305.125 237.5,305.125 240,305.125 242.5,305.125 245,305.125 247.5,305.125 250,305.125 252.5,305.125 255,305.125
IN+27V: C1.1 C2.1 C3.A L1.1 XT1.1
  other v1: 106.5,265 108,265 102.375,266.375 104.875,266.375 103.625,267.125 102.375,267.875 104.875,267.875 103.625,268.625 102.375,269.375 104.875,269.375
IN-27V: C1.2 C2.2 C3.C C4.C C5.2 C6.2 C7.2 C8.2 C9.2 C11.1 R2.1 U1.4 VT1.1 VT1.4 XT2.1 | length 30.4
  Top Layer, Top w0.3: C9.2@144.211,275.139 C9.2@144.211,275.389 ; C9.2@144.25,275.1 C9.2@144.25,275.389 ; 147,275.389 C9.2@144.25,275.389 ; 147.5,278.125 147.875,277.75 147.875,273.25 148.875,272.25 149.15,272.25 ; VT1.4@149.35,271.3 149.35,272.05 ; VT1.1@150.65,273.2 150.65,272.45 ; R2.1@152.55,272.175 152.525,272.2 152.525,272.225 152.5,272.25 150.85,272.25 ; C9.2@144.211,275.389 C9.2@144.25,275.389 ; C9.2@144.211,275.389 144.211,275.436 144.25,275.398 C9.2@144.25,275.389 ; 149.15,272.25 149.35,272.25 ; 149.15,272.25 149.35,272.05 ; 149.35,272.05 149.35,272.25 ; 149.35,272.05 149.55,272.25 ; 149.35,272.25 149.55,272.25 ; 149.55,272.25 150.45,272.25 ; 150.45,272.25 150.65,272.25 ; 150.45,272.25 150.65,272.45 ; 150.65,272.25 150.85,272.25 ; 150.65,272.25 150.65,272.45 ; 150.65,272.45 150.85,272.25
  Top Layer, Top w1: C6.2@133.75,275.1 133.875,275.225 134,275.225 134,275.6 137.5,275.6 C7.2@137.5,275.225 ; C7.2@137.375,275.1 C7.2@137.5,275.225 ; C9.2@144.25,275.1 144.211,275.139 144.125,275.225 C9.2@144.125,275.6 ; C7.2@137.5,275.225 137.75,275.225 137.75,275.6 140.875,275.6 140.875,275.225 C8.2@141,275.1 141,275.6 C9.2@144.125,275.6 ; C9.2@144.125,275.6 C9.2@144.225,275.6 ; C9.2@144.225,275.6 144.35,275.6 144.375,275.625 144.375,275.75 C9.2@144.225,275.6
  other v1: 120.375,274.75 122.875,274.75 125.375,274.75 127.875,274.75 119.125,275.5 121.625,275.5 124.125,275.5 126.625,275.5 102.375,275.75 104.875,275.75 120.375,276.25 122.875,276.25 125.375,276.25 127.875,276.25 103.625,276.5 119.125,277 121.625,277 124.125,277 126.625,277 133.125,277 135.625,277 102.375,277.25 104.875,277.25 120.375,277.75 122.875,277.75 125.375,277.75 127.875,277.75 131.875,277.75 134.375,277.75 103.625,278 119.125,278.5 121.625,278.5 124.125,278.5 126.625,278.5 133.125,278.5 135.625,278.5 102.375,278.75 104.875,278.75 120.375,279.25 122.875,279.25 125.375,279.25 127.875,279.25 131.875,279.25 134.375,279.25 106.5,280 108,280 119.125,280 121.625,280 124.125,280 126.625,280 129.125,280 130.625,280 133.125,280 120.375,280.75 122.875,280.75 125.375,280.75 127.875,280.75 131.875,280.75 134.375,280.75 119.125,281.5 121.625,281.5 124.125,281.5 126.625,281.5 129.125,281.5 130.625,281.5 133.125,281.5 120.375,282.25 122.875,282.25 125.375,282.25 127.875,282.25 131.875,282.375 129.875,282.75 119.125,283 121.625,283 124.125,283 126.625,283
NET00000: R1.2 XT3.1 | length 54.3
  Top Layer, Top w0.3: v1(149.625,276.875) 150.75,275.75 R1.2@150.75,275.625
  Bottom Layer, Bottom w0.6: 109.5,290.5 122.5,290.5 124,289 132.625,289 137.375,284.25 144.125,284.25 146.5,281.875 146.5,280 v1(149.625,276.875)
  Bottom Layer, Bottom w0.9: XT3.1@103.75,290.5 109.5,290.5
NET00001: R3.2 VT1.5 VT1.6 | length 3.8
  Top Layer, Top w0.3: VT1.5@150,271.3 150,270.625 150.125,270.5 150.55,270.5 ; R3.2@150.625,269.25 150.65,269.25 150.65,270.4 ; VT1.6@150.65,271.3 150.65,270.65 ; 150.55,270.5 150.65,270.4 ; 150.55,270.5 150.525,270.525 150.65,270.65 ; 150.55,270.5 150.65,270.5 ; 150.65,270.4 150.65,270.5 ; 150.65,270.5 150.65,270.65
NET00002: R4.1 R5.1 | length 1.9
  Top Layer, Top w0.4: R5.1@257.25,254.25 R4.1@257.25,256.125
NET00003: U2.14 VD1.A | length 34.7
  Top Layer, Top w1.1: VD1.A@120.775,245 v1@122.625,245 ; v1(122.625,244.75) v1@122.625,245 ; v1(122.625,244.75) v1@122.875,245 ; v1(122.625,244.75) 120.75,244.75 120.75,245.25 v1@122.625,245.25 ; v1(122.625,244.75) v1(124.625,244.75) v1(123.625,245.75) 123.125,245.25 ; v1@122.625,245 v1@122.625,245.25 ; v1@122.625,245 v1@122.875,245 ; v1@122.625,245.25 123.125,245.25 ; v1@122.875,245 123.125,245.25
  Bottom Layer, Bottom w0.6: U2.14@131.985,244.135 131.985,244.14 130.125,246 126.25,246 ; v1@123.625,246 v1(123.625,245.75) 123.5,245.875 123.5,246 v1@123.625,246 ; v1@123.625,246 124.75,246 ; 124,244.5 124.25,244.75 124.438,244.938 125.5,246 ; 124,244.5 123.25,244.5 123.5,244.75 124.063,245.312 124.75,246 ; 124,244.5 124.75,244.5 126.25,246 ; 124.75,246 125.5,246 ; 125.5,246 126.25,246
  Bottom Layer, Bottom w1.1: v1(122.625,244.75) v1(123.625,245.75) 124.063,245.312 124.438,244.938 v1(124.625,244.75) 124.25,244.75 123.5,244.75 v1(122.625,244.75)
NET00004: U2.9 VD2.A | length 3.3
  Top Layer, Top w1: VD2.A@123.875,259.375 VD2.A@123.9,259.375 ; VD2.A@124,259.275 VD2.A@123.9,259.375 ; U2.9@127,259.375 U2.9@126.905,259.375 VD2.A@123.9,259.375
NET00005: R4.2 U1.7 | length 18.2
  Top Layer, Top w0.4: v1(257.125,259.625) 257.125,258 R4.2@257.25,257.875
  Top Layer, Top w0.8: v1@257,259.625 v1(257.125,259.625)
  Bottom Layer, Bottom w0.5: 252.125,269.25 253.25,268.125 253.25,263.5 v1(257.125,259.625)
  Bottom Layer, Bottom w0.8: U1.7@248.85,272.5 248.875,272.5 252.125,269.25